# Altium PCB 红黑红黑的小黄鸡二队驱动.PcbDoc
Units mil, origin at the board's own origin, x right, y up, seen from the top; angles counter-clockwise.
Board outline 2841.5 x 1611.5 mil, 2 copper layers (Top Layer, Bottom Layer); 45 components, 46 nets, 184 pads, 204 vias.
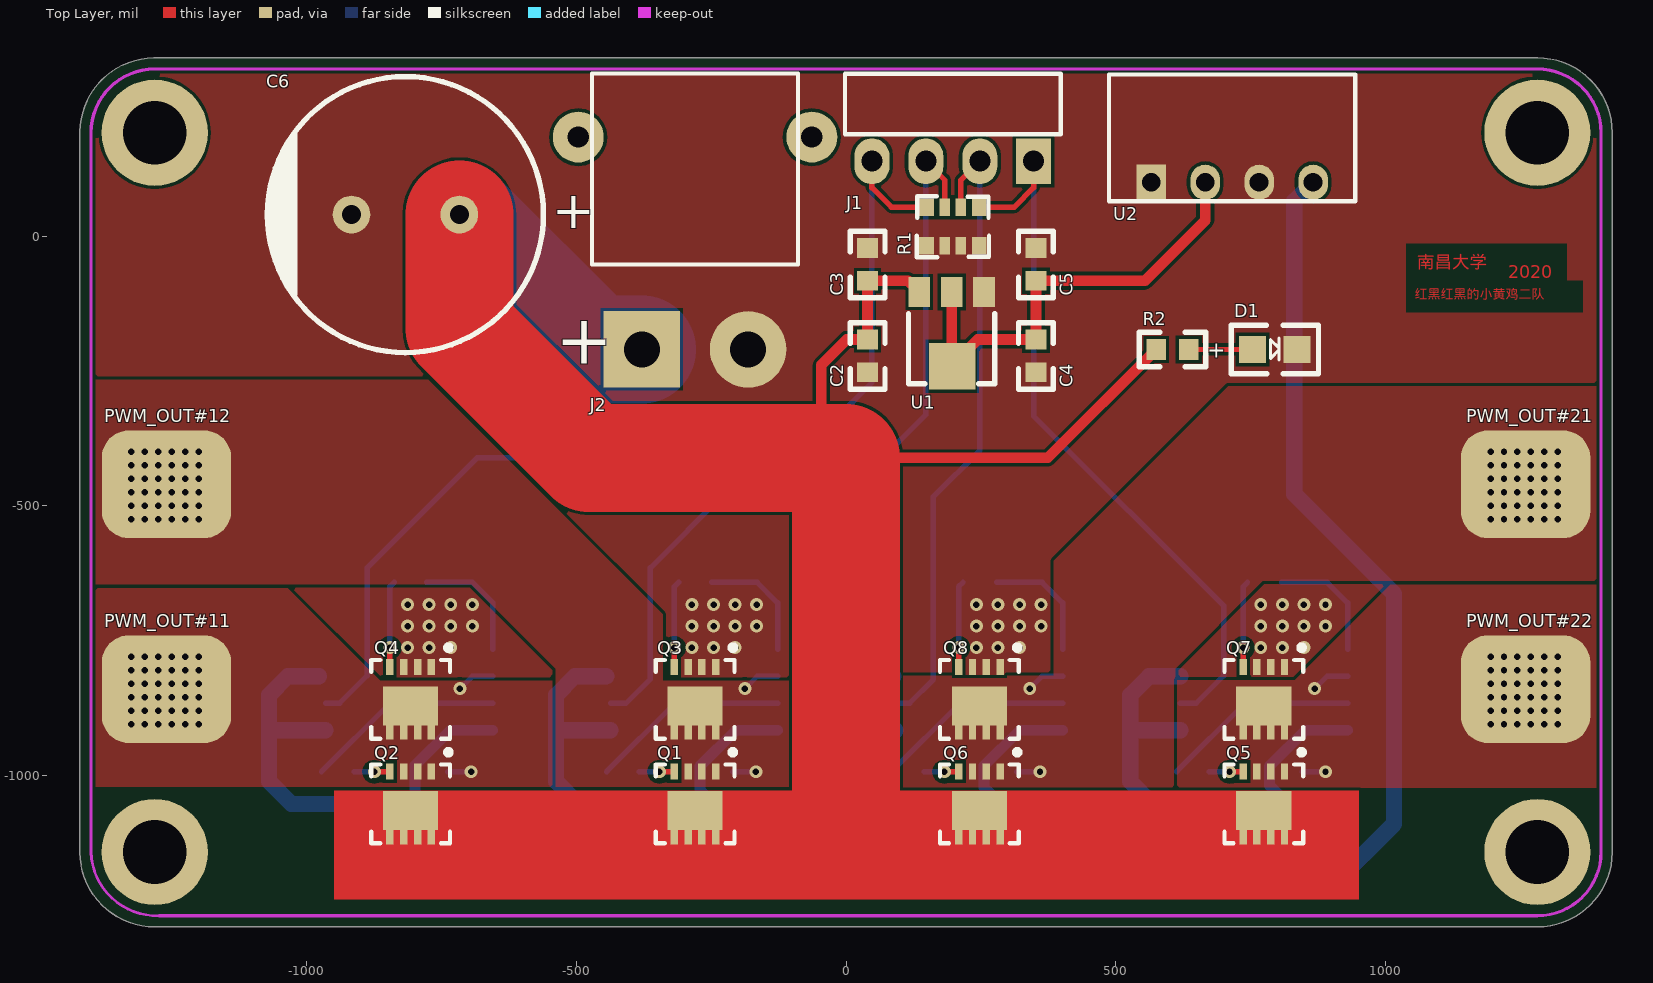
[diagram p0: Top Layer view]
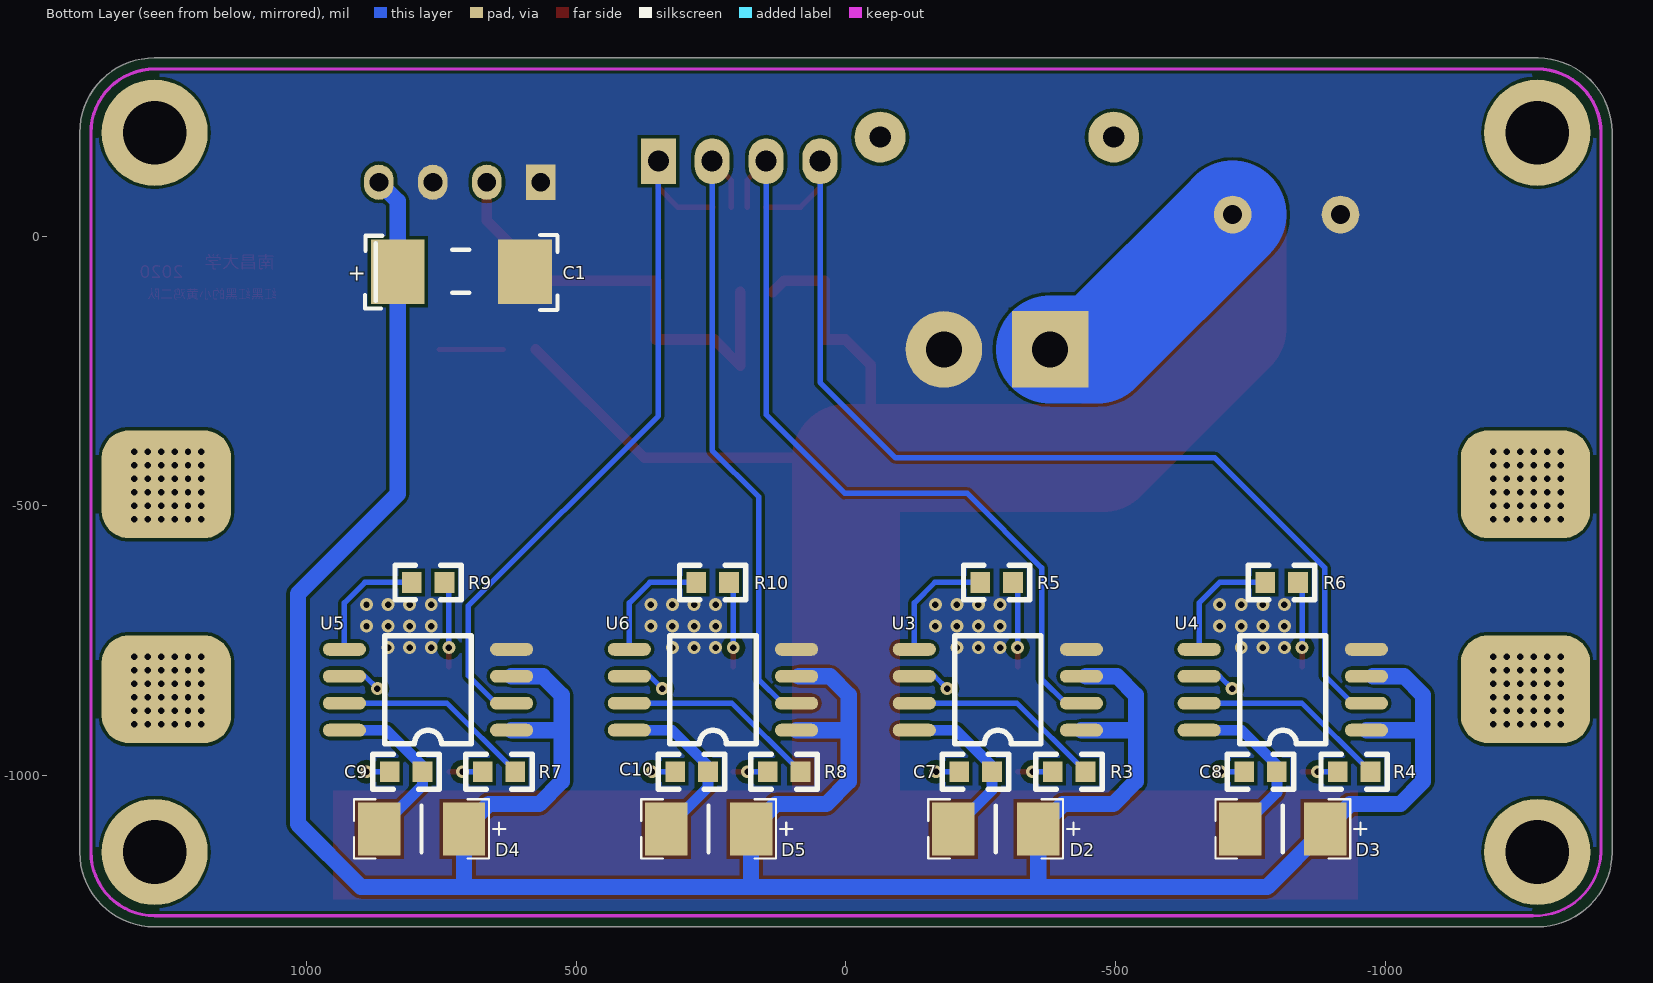
[diagram p1: Bottom Layer view, seen from below]
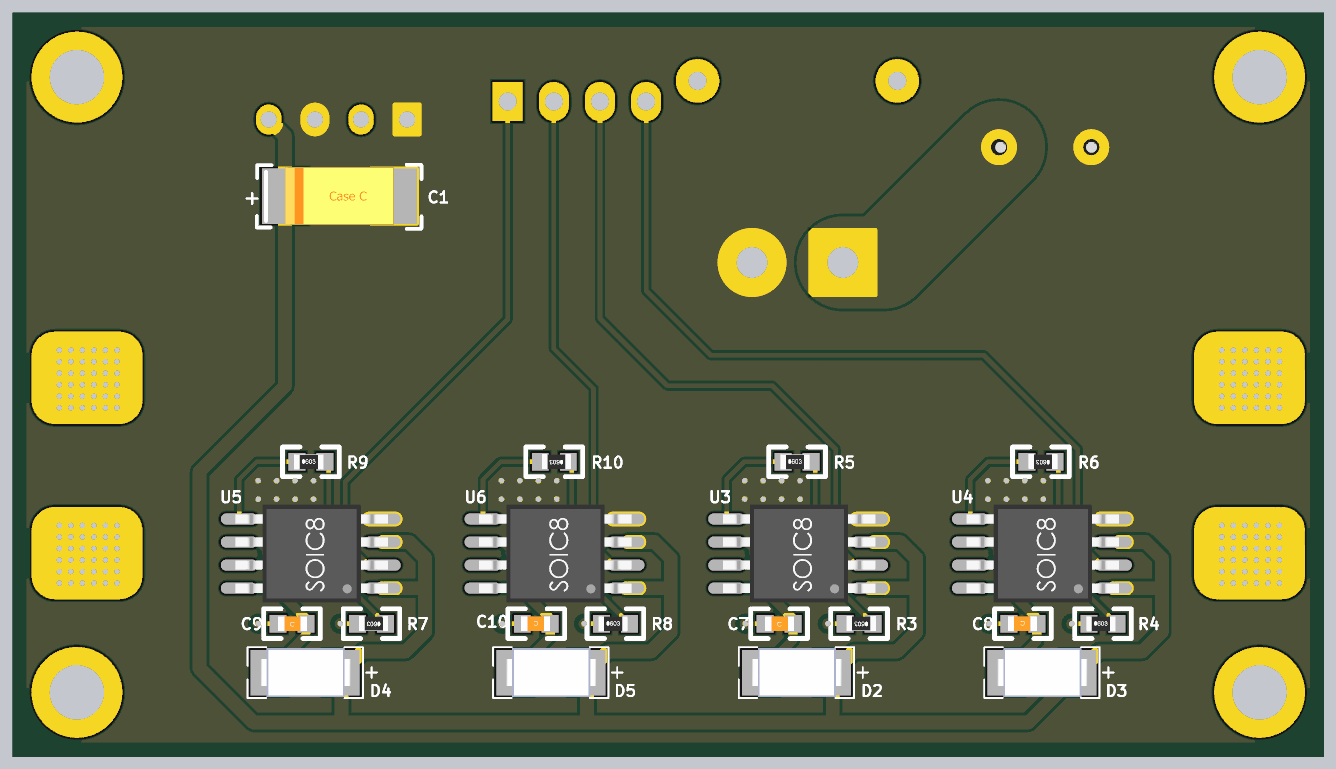
[diagram p2: 3D render of the assembled board from below, using the file's embedded part models]

## Layer stack, top to bottom
Top Solder: solder mask 0.4, Solder Resist, Dk 3.5
Top Layer: signal copper 1.4
Dielectric 1: dielectric 12.6, FR-4, Dk 4.8
Bottom Layer: signal copper 1.4
Bottom Solder: solder mask 0.4, Solder Resist, Dk 3.5

## Board outline
-1420.67,-1142.1 ccw(c-1281.89,-1141.89) -1282.1,-1280.67 ccw(c-1282.07,-1257.04) -1281.58,-1280.67 1281.58,-1280.67 ccw(c1282.07,-1257.04) 1282.1,-1280.67 ccw(c1281.89,-1141.89) 1420.67,-1142.1 ccw(c1397.04,-1142.07) 1420.67,-1142.07 ccw(c1397.04,-1142.07) 1420.67,-1141.58 1420.67,191.58 ccw(c1397.04,192.07) 1420.67,192.07 ccw(c1397.04,192.07) 1420.67,192.1 ccw(c1281.89,191.89) 1282.1,330.67 ccw(c1282.07,307.04) 1281.58,330.67 -1278.23,330.67 ccw(c-1280.95,307.19) -1283.73,330.66 ccw(c-1281.89,191.89) -1420.66,193.73 ccw(c-1397.19,190.95) -1420.67,188.23 -1420.67,-1141.58 ccw(c-1397.04,-1142.07)

## Design rules (kind name [scope] priority, off if disabled: settings)
Clearance Clearance_logo [InNet('LOGO')] p1: gap=0.01
Clearance Clearance_Via [IsVia vs InPolygon] p2: gap=10
Clearance [All] p3: gap=6
PolygonConnect [All] p1: connectstyle=Direct reliefconductorwidth=10 reliefentries=4 polygonreliefangle="90 Angle" airgapwidth=10
RoutingVias [All] p1: holewidth=12 width=24 viastyle="Through Hole" minholewidth=12 minwidth=24 maxholewidth=12 maxwidth=24
SolderMaskExpansion [All] p1: expansion=4
UnpouredPolygon [All] p1: allowunpoured=FALSE
Width Width_logo [InNet('LOGO')] p1: maxlimit=10 minlimit=0.01 preferedwidth=10
Width [All] p2: maxlimit=500 minlimit=10 preferedwidth=10
29 further rules are at their usual default settings.

## Components (designator, comment, footprint, x,y, rotation, side; value= is the part's Value field where it differs from the comment)
C1 "CAP-TAN-6032(C)" CAP-6032 713,-66 r180 bottom locked
C2 "CAP-0603(1608)" C0603 40,-252.35 r90 top locked
C3 "CAP-0603(1608)" C0603 40,-22 r270 top locked
C4 "CAP-0603(1608)" C0603 352,-252.35 r90 top locked
C5 "CAP-0603(1608)" C0603 352,-22 r270 top locked
C6 "CAP-DIP-8*14" C13x20 -717,39 r0 top locked
C7 "CAP-0603(1608)" C0603 -210,-993 r180 bottom locked
C8 "CAP-0603(1608)" C0603 -799,-993 r0 bottom locked
C9 "CAP-0603(1608)" C0603 846,-993 r180 bottom locked
C10 "CAP-0603(1608)" C0603 256,-993 r0 bottom locked
D1 "LED-0805" LED0805 754,-210 r0 top locked
D2 "1N5819-S4" SOD-214 -277.67,-1099 r0 bottom locked
D3 "1N5819-S4" SOD-214 -810,-1099 r0 bottom locked
D4 "1N5819-S4" SOD-214 787,-1099 r0 bottom locked
D5 "1N5819-S4" SOD-214 254.67,-1099 r0 bottom locked
J1 "Header1x4" "HEADER1X4 - BENT" 200,140 r180 top locked
J2 "XT30-M" XT30PW-M -280,-210 r0 top locked
PWM_OUT#11 "TEST" "TEST PAD 1.8"#1 -1254,-837 r90 top locked (schematic designator TP4)
PWM_OUT#12 "TEST" "TEST PAD 1.8"#2 -1258,-466 r90 top locked (schematic designator TP3)
PWM_OUT#21 "TEST" "TEST PAD 1.8"#3 1207,-539 r90 top locked (schematic designator TP2)
PWM_OUT#22 "TEST" "TEST PAD 1.8"#4 1210,-890 r90 top locked (schematic designator TP1)
Q1 "AON7400A" "DFN 3x3" -280,-1052.8 r270 top locked
Q2 "AON7400A" "DFN 3x3" -807.33,-1052.8 r270 top locked
Q3 "AON7400A" "DFN 3x3" -280,-858.8 r270 top locked
Q4 "AON7400A" "DFN 3x3" -807.33,-858.8 r270 top locked
Q5 "AON7400A" "DFN 3x3" 774.67,-1052.8 r270 top locked
Q6 "AON7400A" "DFN 3x3" 247.33,-1052.8 r270 top locked
Q7 "AON7400A" "DFN 3x3" 774.67,-858.8 r270 top locked
Q8 "AON7400A" "DFN 3x3" 247.33,-858.8 r270 top locked
R1 "RES-0603-PACK" "RES-0603 - PACK" 197,18 r90 top locked
R2 "RES-0603" R0603 575,-210 r0 top locked
R3 "RES-0603" R0603 -444,-993 r0 bottom locked
R4 "RES-0603" R0603 -912,-993 r180 bottom locked
R5 "RES-0603" R0603 -249.04,-642 r180 bottom locked
R6 "RES-0603" R0603 -838,-642 r0 bottom locked
R7 "RES-0603" R0603 613,-993 r0 bottom locked
R8 "RES-0603" R0603 145,-993 r180 bottom locked
R9 "RES-0603" R0603 805,-642 r180 bottom locked
R10 "RES-0603" R0603 216.91,-642 r0 bottom locked
U1 "LM1117" SOT-89 194,-104 r180 top locked
U2 "B0505S-1W" B_S-1W 716,100 r180 top locked
U3 "IR2104" SOIC8 -281.67,-841 r0 bottom locked
U4 "IR2104" SOIC8 -810,-841 r0 bottom locked
U5 "IR2104" SOIC8 775,-841 r0 bottom locked
U6 "IR2104" SOIC8 246.67,-841 r0 bottom locked

## Footprints (in the part's own frame and the unit in brackets; to place one, negate y for a bottom-side part, rotate by r counter-clockwise, add the part's x,y. Pads: shape width x height; smd on the part's side, far side on the other; paste and mask are expansions set on the pad)
B_S-1W [mil]
  rect 55x65 hole 35: 1(150,0)
  oval 55x65 hole 35: 2(50,0) 3(-50,0) 4(-150,0)
  silkscreen extent -228,-200 228,35
C13x20 [mil] "RB.2/.5"
  round 70 hole 35: 1(0,1) 2(-200,1)
  silkscreen extent -356,-255 156,257, body extent -348,-245 144,247, height 787
C0603 [mm]
  rect 0.93x0.98 smd: 1(0,0) 2(1.54,0)
  silkscreen extent -0.79,-0.82 2.33,0.82, body extent 0,-0.41 1.6,0.4, height 0.88
CAP-6032 [mil]
  rect 100x120 smd: 1(-118.1,0.01) 2(118.12,0.01)
  silkscreen extent -179,-71 178,68, body extent -118,-63 118,63, height 98
"DFN 3x3" [mm]
  rect 1.84x2.6 smd: D(0.31,0)
  rect 0.75x0.35 smd: D(1.525,0.975) D(1.525,-0.325) D(1.525,0.325) D(1.525,-0.975) G(-1.525,-0.975) S(-1.525,0.975) S(-1.525,-0.325) S(-1.525,0.325)
  silkscreen extent -2.56,-1.85 1.85,1.9
"HEADER1X4 - BENT" [mil]
  rect 65x85 hole 39: 1(-148,1)
  oval 65x85 hole 39: 2(-48,1) 3(52,1) 4(152,1)
  silkscreen extent -198,-161 202,-49, body extent -199,-394 201,14, height 121
LED0805 [mil] "1/8W"
  rect 50x50 smd: 1(0,0) 2(82.3,0.2)
  silkscreen extent -40,-45 122,45, body extent 2,-25 80,25, height 20
R0603 [mm]
  rect 0.93x0.98 smd: 1(0,0) 2(1.54,0)
  silkscreen extent -0.79,-0.82 2.33,0.82, body extent -0.15,-0.42 1.45,0.4, height 0.45
"RES-0603 - PACK" [mil]
  rect 32.5x27.56 smd: 1(-36,48) 4(-36,-50) 5(36.01,-50) 8(36,48)
  rect 32.5x19.68 smd: 2(-36,14) 3(-36,-16) 6(36.01,-16) 7(36.01,14)
  silkscreen extent -57,-68 56,66, body extent -41,-64 41,62
SOD-214 [mm]
  rect 2x2.5 smd: 1(-2,0) 2(2,0)
  silkscreen extent -3.95,-1.4 3.17,1.4, body extent -2.53,-1.35 2.47,1.35, height 2.25
SOIC8 [mil]
  oval 80x24 smd: 1(-155,75) 2(-155,25) 3(-155,-25) 4(-155,-75) 5(155,-75) 6(155,-25) 7(155,25) 8(155,75)
  silkscreen extent -80,-100 80,100, body extent -167,-106 163,106, height 91
SOT-89 [mil]
  rect 40x55 smd: 1(-61.82,-0.57) 2(-1.82,-0.57) 3(58.18,-0.57)
  rect 86.61x86.61 smd: 2(-2.76,137.22)
  silkscreen extent -82,39 78,169, body extent -90,-6 87,163, height 59
"TEST PAD 1.8"#1 [mil]
  rrect50% 200x240 all layers, no hole: 1(-3,6)
"TEST PAD 1.8"#2 [mil]
  rrect50% 200x240 all layers, no hole: 1(6,2)
"TEST PAD 1.8"#3 [mil]
  rrect50% 200x240 all layers, no hole: 1(79,-53)
"TEST PAD 1.8"#4 [mil]
  rrect50% 200x240 all layers, no hole: 1(50,-50)
XT30PW-M [mm]
  round 2.4 hole 1: 0(-5.5,10) 0(5.5,10)
  rect 3.6x3.6 hole 1.7: 1(-2.5,0)
  round 3.6 hole 1.7: 2(2.5,0)
  silkscreen extent -4.85,4 4.85,13

## Part data
C1: "0.47~220UF"
C6: "100UF"
D2 D3 D4 D5: "S4"
J2: "Ir=15A, Imax=30A, Vr=500V, Rc=0.8mΩ, -20°C-120°C, 1000Times"
PWM_OUT#11 PWM_OUT#12 PWM_OUT#21 PWM_OUT#22: "测试点"
Q1 Q2 Q3 Q4 Q5 Q6 Q7 Q8: library part AON7400, "NMOS"

## Free pads (board coordinates)
  round 196.85 hole 118.11: 0(-1281.89,-1141.89) 0(-1281.89,191.89) 0(1281.89,-1141.89) 0(1281.89,191.89)

## Via types
v1: diameter 24, hole 12, Top Layer to Bottom Layer, tented both sides, 204 vias

## Nets (pads, with @x,y where several pads share a name; then routed paths per layer and width w, separated by ;. In a path a pad name is that pad's centre, name@x,y a point inside that pad or via, vN(x,y) a via of type N, cw(c..) or ccw(c..) an arc to the next point about the centre after c; other vN are vias at no path point)
GND: C1.2 C2.1 C3.1 C4.1 C5.1 C6.2 D1.2 J2.2 Q3.S Q4.S Q7.S Q8.S R1.1 R1.2 R1.3 R1.4 U1.1 U2.1 U2.3 U3.4 U4.4 U5.4 U6.4
  other v1: -813,-763 -773,-763 -733,-763 -285.67,-763 -245.67,-763 -205.67,-763 241.67,-763 281.67,-763 321.67,-763 769,-763 809,-763 849,-763 -813,-723 -773,-723 -733,-723 -693,-723 -285.67,-723 -245.67,-723 -205.67,-723 -165.67,-723 241.67,-723 281.67,-723 321.67,-723 361.67,-723 769,-723 809,-723 849,-723 889,-723 -813,-683 -773,-683 -733,-683 -693,-683 -285.67,-683 -245.67,-683 -205.67,-683 -165.67,-683 241.67,-683 281.67,-683 321.67,-683 361.67,-683 769,-683 809,-683 849,-683 889,-683
GND_1: 
GND_2: 
GND_3: 
NetC1_1: 
NetC2_1: 
NetC4_1: 
NetC7_2: C7.2 D2.2 U3.8 | length 317.6
  Bottom Layer w20: D2.2 -270.63,-1027.3 C7.2 -270.63,-982.63 -204,-916 U3.8
NetC8_1: C8.1 D3.2 U4.8 | length 317
  Bottom Layer w20: D3.2 -799,-1031.26 C8.1 -799,-981 -734,-916 U4.8
NetC9_2: C9.2 D4.2 U5.8 | length 321.9
  Bottom Layer w20: D4.2 785.37,-1018.63 C9.2 785.37,-982.63 852,-916 U5.8
NetC10_1: C10.1 D5.2 U6.8 | length 322.1
  Bottom Layer w20: D5.2 256,-1021.59 C10.1 256,-982 322,-916 U6.8
NetCHQ1_1: 
NetD1_1: D1.1 R2.2 | length 118.4
  Top Layer w10: R2.2 D1.1
NetQ1_G: Q1.G R3.2 | length 65.1
  Top Layer w10: v1(-346,-993) -318.63,-993 Q1.G
  Bottom Layer w10: R3.2 v1(-346,-993)
NetQ2_G: Q2.G R4.1 | length 66.4
  Top Layer w10: v1(-874.63,-993) -845.96,-993 Q2.G
  Bottom Layer w10: R4.1 v1(-874.63,-993)
NetQ3_G: Q3.G R5.2 | length 160
  Top Layer w10: Q3.G v1(-318.39,-763)
  Bottom Layer w10: v1(-318.39,-763) -318.39,-649.84 R5.2@-310.54,-642
NetQ4_G: Q4.G R6.1 | length 160
  Top Layer w10: Q4.G v1(-845.72,-763)
  Bottom Layer w10: v1(-845.72,-763) -845.72,-649.72 R6.1
NetQ5_G: Q5.G R7.2 | length 62.4
  Top Layer w10: v1(711,-993) Q5.G@736.04,-993
  Bottom Layer w10: R7.2 v1(711,-993)
NetQ6_G: Q6.G R8.1 | length 64
  Top Layer w10: v1(182.37,-993) 182.61,-992.76 Q6.G
  Bottom Layer w10: R8.1 v1(182.37,-993)
NetQ7_G: Q7.G R9.2 | length 160.1
  Top Layer w10: Q7.G v1(736.28,-763)
  Bottom Layer w10: v1(736.28,-763) 736.28,-650.09 R9.2
NetQ8_G: Q8.G R10.1 | length 160.1
  Top Layer w10: Q8.G v1(208.95,-763)
  Bottom Layer w10: v1(208.95,-763) 208.95,-649.97 R10.1
NetR3_1: R3.1 U3.7 | length 369.9
  Bottom Layer w10: R3.1 -317,-866 U3.7
NetR4_2: R4.2 U4.7 | length 370.2
  Bottom Layer w10: R4.2 -845.63,-866 U4.7
NetR5_1: R5.1 U3.5 | length 224.1
  Bottom Layer w10: R5.1 -164.67,-642 -126.67,-680 U3.5
NetR6_2: R6.2 U4.5 | length 224.1
  Bottom Layer w10: R6.2 -693,-642 -655,-680 U4.5
NetR7_1: R7.1 U5.7 | length 369.6
  Bottom Layer w10: R7.1 740,-866 U5.7
NetR8_2: R8.2 U6.7 | length 369.9
  Bottom Layer w10: R8.2 211.37,-866 U6.7
NetR9_1: R9.1 U5.5 | length 224.1
  Bottom Layer w10: R9.1@807.63,-642 892,-642 930,-680 U5.5
NetR10_2: R10.2 U6.5 | length 224.1
  Bottom Layer w10: R10.2@279.3,-642 363.67,-642 401.67,-680 U6.5
OUT_1: 
OUT_2: 
OUT_3: 
PWM_IN#11: J1.4 R1.8 U4.2 | length 1951.5
  Top Layer w10: J1.4 48,90 84,54 R1.8
  Bottom Layer w10: U4.2 -939,-866 -888,-815 -888,-615 -684,-411 -92,-411 48,-271 J1.4
PWM_IN#12: J1.3 R1.7 U3.2 | length 1496.4
  Top Layer w10: J1.3 183,104 R1.7
  Bottom Layer w10: U3.2 -408,-866 -363,-821 -363,-615 -225,-477 2,-477 148,-331 J1.3
PWM_IN#21: J1.2 R1.6 U6.2 | length 1184.7
  Top Layer w10: R1.6 213,104 J1.2
  Bottom Layer w10: U6.2 118,-866 162,-822 162,-483 248,-397 J1.2
PWM_IN#22: J1.1 R1.5 U5.2 | length 1365.8
  Top Layer w10: R1.5 312.01,54.01 348,90 J1.1
  Bottom Layer w10: J1.1 348,-333 700,-685 700,-815 649,-866 U5.2
PWM_OUT#11: C8.2 PWM_OUT#11.1 Q2.S Q4.D U4.6 | length 113.5
  Bottom Layer w10: C8.2 v1(-695.37,-993) ; v1(-716,-839) -693,-816 U4.6
  other v1: -1325,-905 -1300,-905 -1275,-905 -1250,-905 -1225,-905 -1200,-905 -1325,-880 -1300,-880 -1275,-880 -1250,-880 -1225,-880 -1200,-880 -1325,-855 -1300,-855 -1275,-855 -1250,-855 -1225,-855 -1200,-855 -1325,-830 -1300,-830 -1275,-830 -1250,-830 -1225,-830 -1200,-830 -1325,-805 -1300,-805 -1275,-805 -1250,-805 -1225,-805 -1200,-805 -1325,-780 -1300,-780 -1275,-780 -1250,-780 -1225,-780 -1200,-780
PWM_OUT#12: C7.1 PWM_OUT#12.1 Q1.S Q3.D U3.6 | length 113.5
  Bottom Layer w10: C7.1 v1(-167,-993) ; v1(-187.67,-839) -164.67,-816 U3.6
  other v1: -1325,-525 -1300,-525 -1275,-525 -1250,-525 -1225,-525 -1200,-525 -1325,-500 -1300,-500 -1275,-500 -1250,-500 -1225,-500 -1200,-500 -1325,-475 -1300,-475 -1275,-475 -1250,-475 -1225,-475 -1200,-475 -1325,-450 -1300,-450 -1275,-450 -1250,-450 -1225,-450 -1200,-450 -1325,-425 -1300,-425 -1275,-425 -1250,-425 -1225,-425 -1200,-425 -1325,-400 -1300,-400 -1275,-400 -1250,-400 -1225,-400 -1200,-400
PWM_OUT#21: C10.2 PWM_OUT#21.1 Q6.S Q8.D U6.6 | length 113.5
  Bottom Layer w10: C10.2 v1(359.63,-993) ; v1(340.67,-839) 363.67,-816 U6.6
  other v1: 1195,-525 1220,-525 1245,-525 1270,-525 1295,-525 1320,-525 1195,-500 1220,-500 1245,-500 1270,-500 1295,-500 1320,-500 1195,-475 1220,-475 1245,-475 1270,-475 1295,-475 1320,-475 1195,-450 1220,-450 1245,-450 1270,-450 1295,-450 1320,-450 1195,-425 1220,-425 1245,-425 1270,-425 1295,-425 1320,-425 1195,-400 1220,-400 1245,-400 1270,-400 1295,-400 1320,-400
PWM_OUT#22: C9.1 PWM_OUT#22.1 Q5.S Q7.D U5.6 | length 113.5
  Bottom Layer w10: C9.1 v1(889,-993) ; v1(869,-839) 892,-816 U5.6
  other v1: 1195,-905 1220,-905 1245,-905 1270,-905 1295,-905 1320,-905 1195,-880 1220,-880 1245,-880 1270,-880 1295,-880 1320,-880 1195,-855 1220,-855 1245,-855 1270,-855 1295,-855 1320,-855 1195,-830 1220,-830 1245,-830 1270,-830 1295,-830 1320,-830 1195,-805 1220,-805 1245,-805 1270,-805 1295,-805 1320,-805 1195,-780 1220,-780 1245,-780 1270,-780 1295,-780 1320,-780
VCC_5V: C4.2 C5.2 U1.2 U2.2 | length 853.5
  Top Layer w20: U1.2@195.82,-103.43 195.82,-240.28 244.38,-191.72 C4.2 C5.2 554.37,-82.63 666,29 U2.2
VCC_5V_1: 
VCC_5V_2: 
VCC_5V_3: 
VCC_7V2: C2.2 C3.2 C6.1 J2.1 Q1.D Q2.D Q5.D Q6.D R2.1 U1.3 | length 3339
  Top Layer w20: U1.3 115.02,-82.63 C3.2 C2.2 1.28,-191.72 -46,-239 -46,-365 0,-411 374,-411 R2.1
  Top Layer w200: C6.1 -717,-171 -477,-411 0,-411 0,-1112
  Bottom Layer w200: C6.1 -467,-210 J2.1
VCC_12V: C1.1 D2.1 D3.1 D4.1 D5.1 U2.4 U3.1 U3.3 U4.1 U4.3 U5.1 U5.3 U6.1 U6.3 | length 5931.2
  Bottom Layer w30: U4.3@-977,-816 -1035,-816 -1070,-851 -1070,-916 ; U4.1 -1070,-916 ; -536.67,-916 U3.1 ; U3.3@-444.67,-816 -502.67,-816 -537.67,-851 -537.67,-1011 -495.67,-1053 -402.41,-1053 D2.1 -356.41,-1206.59 ; -0.33,-916 U6.1 ; U6.3@87.67,-816 29.67,-816 -5.33,-851 -5.33,-1011 36.67,-1053 129.93,-1053 D5.1 175.93,-1206.07 ; U5.1 527,-916 ; U5.3 562,-816 527,-851 527,-916 ; 708.26,-1205.74 D4.1 662.26,-1053 569,-1053 527,-1011 527,-916 ; U2.4 831.1,65.1 C1.1 831.1,-478.1 1016,-663 1016,-1090 899,-1207 -780.74,-1207 D3.1 -934.74,-1053 -1028,-1053 -1070,-1011 -1070,-916
pads on no net: J2.0

## Polygon pours and split planes (outlines as drawn)
PWM_OUT#11 on Top Layer "PWM_OUT" (solid, remove dead copper, pour order 22): -1400,-653 -1400,-1021 -545,-1021 -545,-824 -864,-824 -1035,-653
PWM_OUT#12 on Top Layer "PWM_OUT" (solid, remove dead copper, pour order 19): -538,-1021 -103,-1021 -103,-824 -340,-824 -340,-701 -775,-266 -1393,-266 -1393,-645 -695,-645 -538,-802
PWM_OUT#22 on Top Layer "PWM_OUT" (solid, remove dead copper, pour order 20): 614,-1023 614,-823 832,-823 1009,-646 1400,-646 1400,-1023
PWM_OUT#21 on Top Layer "PWM_OUT" (solid, remove dead copper, pour order 21): 101,-815 385,-815 385,-602 709,-278 1404,-278 1404,-643 1400,-647 1392,-639 773,-639 610,-802 610,-1027 101,-1027
GND on Top Layer "Top Layer-GND" (solid, remove dead copper, pour order 23): -1402.97,-1141.89 ccw(c-1281.89,-1141.89) -1281.89,-1262.97 ccw(c-1281.89,-1260.01) -1281.71,-1262.97 1281.71,-1262.97 ccw(c1281.89,-1260.01) 1281.89,-1262.97 ccw(c1281.89,-1141.89) 1402.97,-1141.89 ccw(c1400.01,-1141.89) 1402.97,-1141.71 1402.97,191.71 ccw(c1400.01,191.89) 1402.97,191.89 ccw(c1281.89,191.89) 1281.89,312.97 ccw(c1281.89,310.01) 1281.71,312.97 -1280,312.97 ccw(c-1280,310) -1280.94,312.82 ccw(c-1281.89,310.01) -1281.89,312.97 ccw(c-1281.89,191.89) -1402.97,191.89 ccw(c-1400.01,191.89) -1402.82,190.94 ccw(c-1400,190) -1402.97,190 -1402.97,-1141.71 ccw(c-1400.01,-1141.89)
GND on Bottom Layer "Bottom Layer-GND" (solid, remove dead copper, pour order 24): -1402.97,-1141.89 ccw(c-1281.89,-1141.89) -1281.89,-1262.97 ccw(c-1281.89,-1260.01) -1281.71,-1262.97 1281.71,-1262.97 ccw(c1281.89,-1260.01) 1281.89,-1262.97 ccw(c1281.89,-1141.89) 1402.97,-1141.89 ccw(c1400.01,-1141.89) 1402.97,-1141.71 1402.97,191.71 ccw(c1400.01,191.89) 1402.97,191.89 ccw(c1281.89,191.89) 1281.89,312.97 ccw(c1281.89,310.01) 1281.71,312.97 -1280,312.97 ccw(c-1280,310) -1280.94,312.82 ccw(c-1281.89,310.01) -1281.89,312.97 ccw(c-1281.89,191.89) -1402.97,191.89 ccw(c-1400.01,191.89) -1402.82,190.94 ccw(c-1400,190) -1402.97,190 -1402.97,-1141.71 ccw(c-1400.01,-1141.89)

## Keep-outs
Keep-Out Layer:
  lines w5: -1400,-1141.9 ccw(c-1277.95,-1137.95) -1274,-1260
  lines w5.91: -1400,-1141.9 -1400,190 ; -1400.01,191.89 cw(c-1281.89,191.89) -1281.89,310.01 ; -1280,310 1281.9,310 cw(c1281.89,191.89) 1400.01,191.89 1400,-1141.9 cw(c1281.89,-1141.89) 1281.89,-1260.01 -1274,-1260

## Other copper
Top Layer:
  rectangle net VCC_7V2: -949,-1230 951,-1028
  text "南昌大学" at 1059.37,-67.75 h40
  text "2020" at 1228.08,-86.34 h40
  text "红黑红黑的小黄鸡二队" at 1054.37,-122.75 h30

## Silkscreen, mask and mechanical layers (free items; w line width, h text height)
Top Solder:
  text "南昌大学" at 1059.37,-67.75 h40
  text "2020" at 1228.08,-86.34 h40
  text "红黑红黑的小黄鸡二队" at 1054.37,-122.75 h30
Mechanical 1:
  lines w5.91: -1400,-1141.9 -1400,190 ; -1400.01,191.89 cw(c-1281.89,191.89) -1281.89,310.01 ; -1281.9,-1260 1281.9,-1260 ccw(c1281.89,-1141.89) 1400.01,-1141.89 1400,191.9 ccw(c1281.89,191.89) 1281.89,310.01 -1280,310
  lines w47.24: -1282.07,-1257.04 cw(c-1281.89,-1141.89) -1397.04,-1142.07 ccw(c-1400,-1141.9) -1397.03,-1141.9 -1397.03,190 ccw(c-1400,190) -1397.19,190.95 ccw(c-1400.01,191.89) -1397.04,191.89 cw(c-1281.89,191.89) -1281.89,307.04 ccw(c-1281.89,310.01) -1280.95,307.19 ccw(c-1280,310) -1280,307.03 1281.9,307.03 ccw(c1281.9,310) 1282.07,307.04 cw(c1281.89,191.89) 1397.04,192.07 ccw(c1400,191.9) 1397.03,191.9 1397.03,-1141.9 ccw(c1400,-1141.9) 1397.04,-1142.07 cw(c1281.89,-1141.89) 1282.07,-1257.04 ccw(c1281.9,-1260) 1281.9,-1257.03 -1281.9,-1257.03

## Text inside footprints (layer, text, board x,y; h text height)
C1: Bottom Overlay "+" at 924,-83 h30
C6: Top Overlay "+" at -545,15 h68.9
D1: Top Overlay "+" at 704,-225 h30
J2: Top Overlay "+" at -538,-267 h157.48